# Altium PCB PCB1 (Light).PcbDoc
Units mm, origin at the board's own origin, x right, y up, seen from the top; angles counter-clockwise.
Board outline 40 x 66.29 mm, 2 copper layers (Top Layer, Bottom Layer); 16 components, 6 nets, 35 pads, 0 vias.
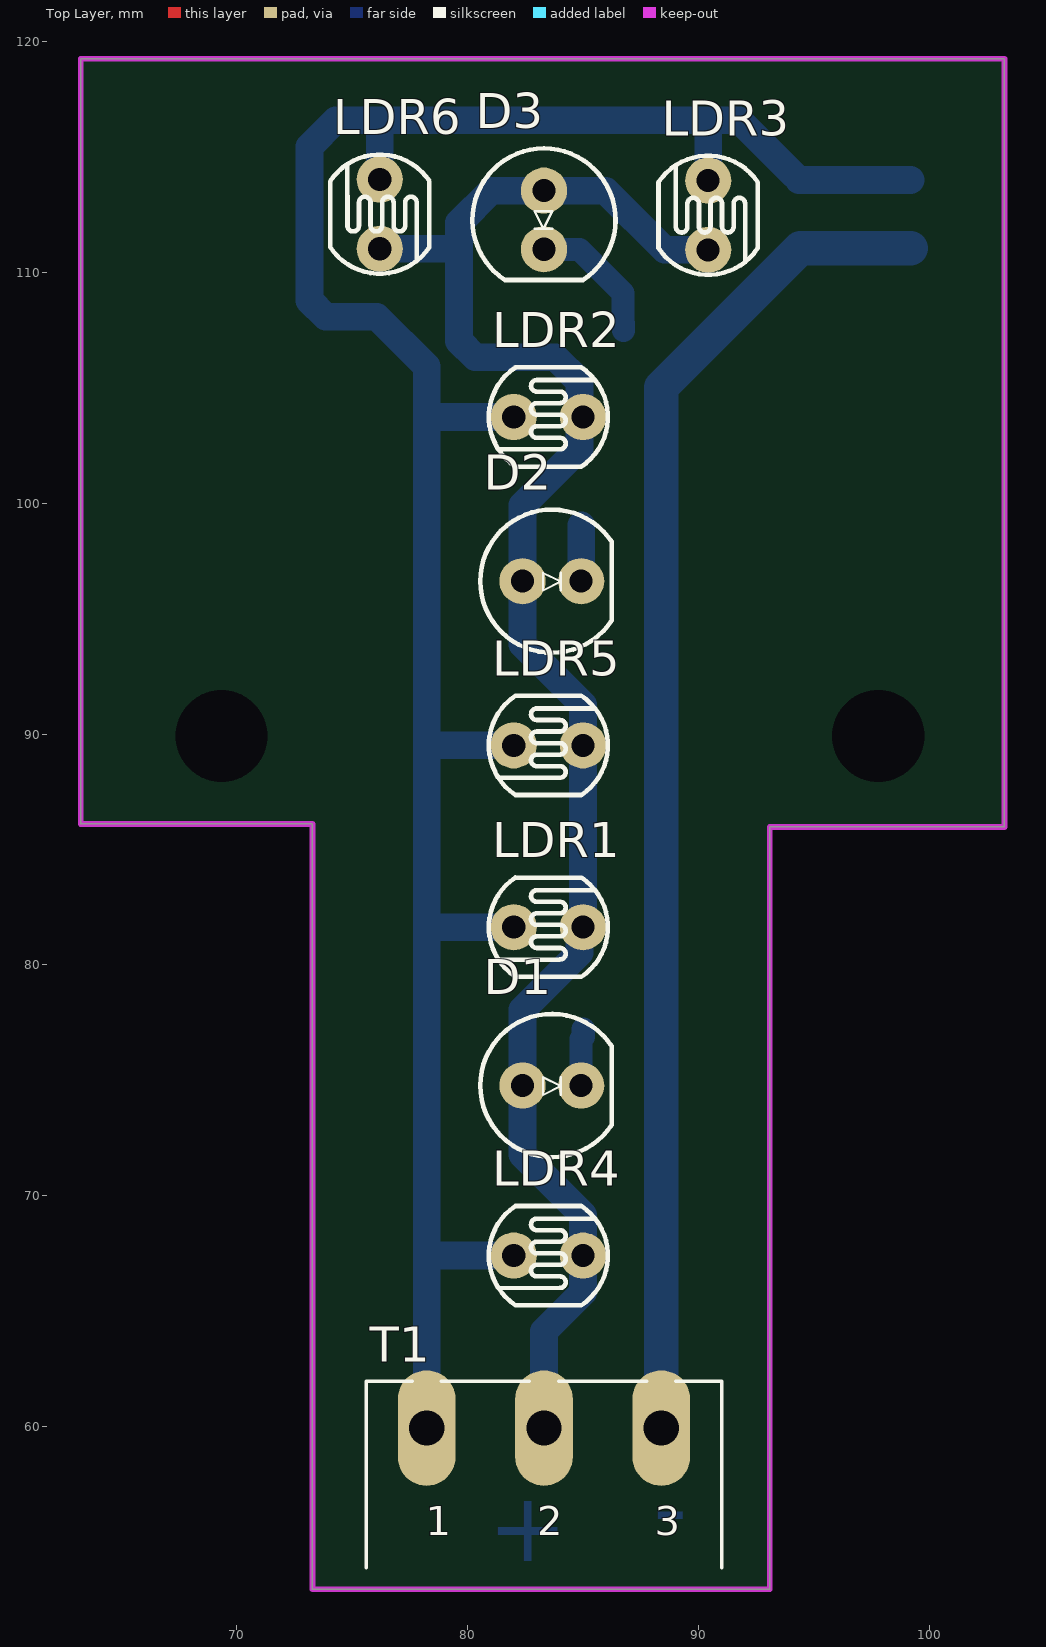
[diagram p0: Top Layer view]
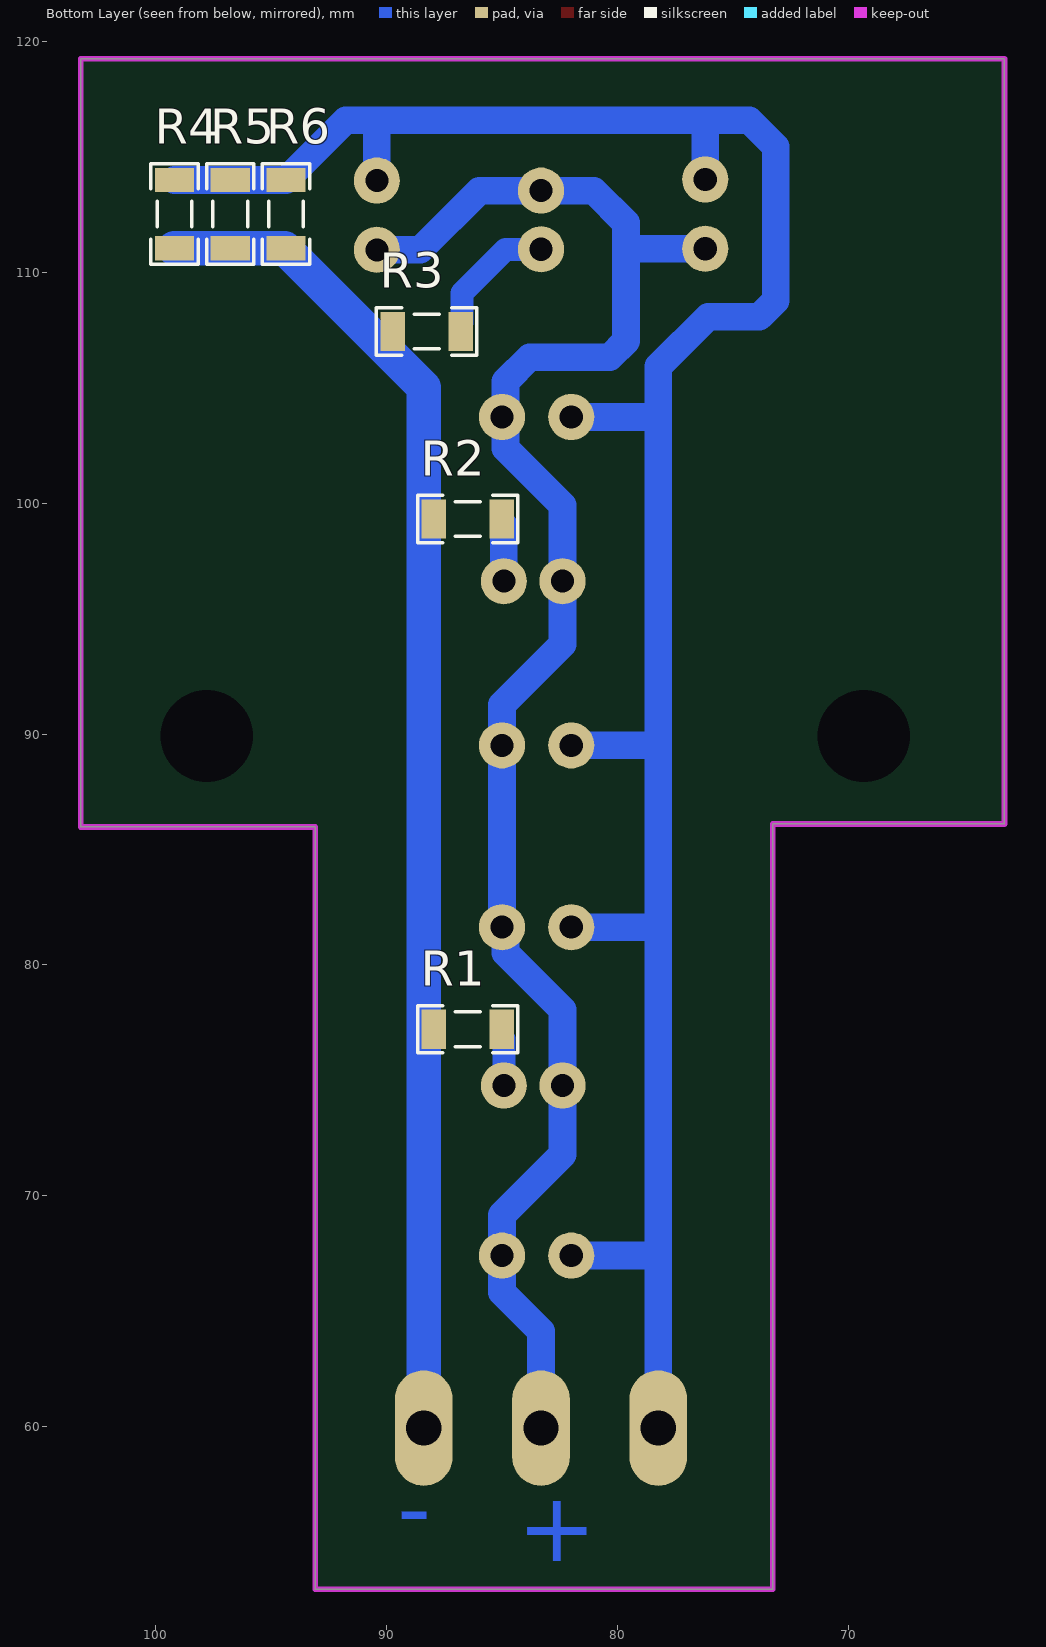
[diagram p1: Bottom Layer view, seen from below]
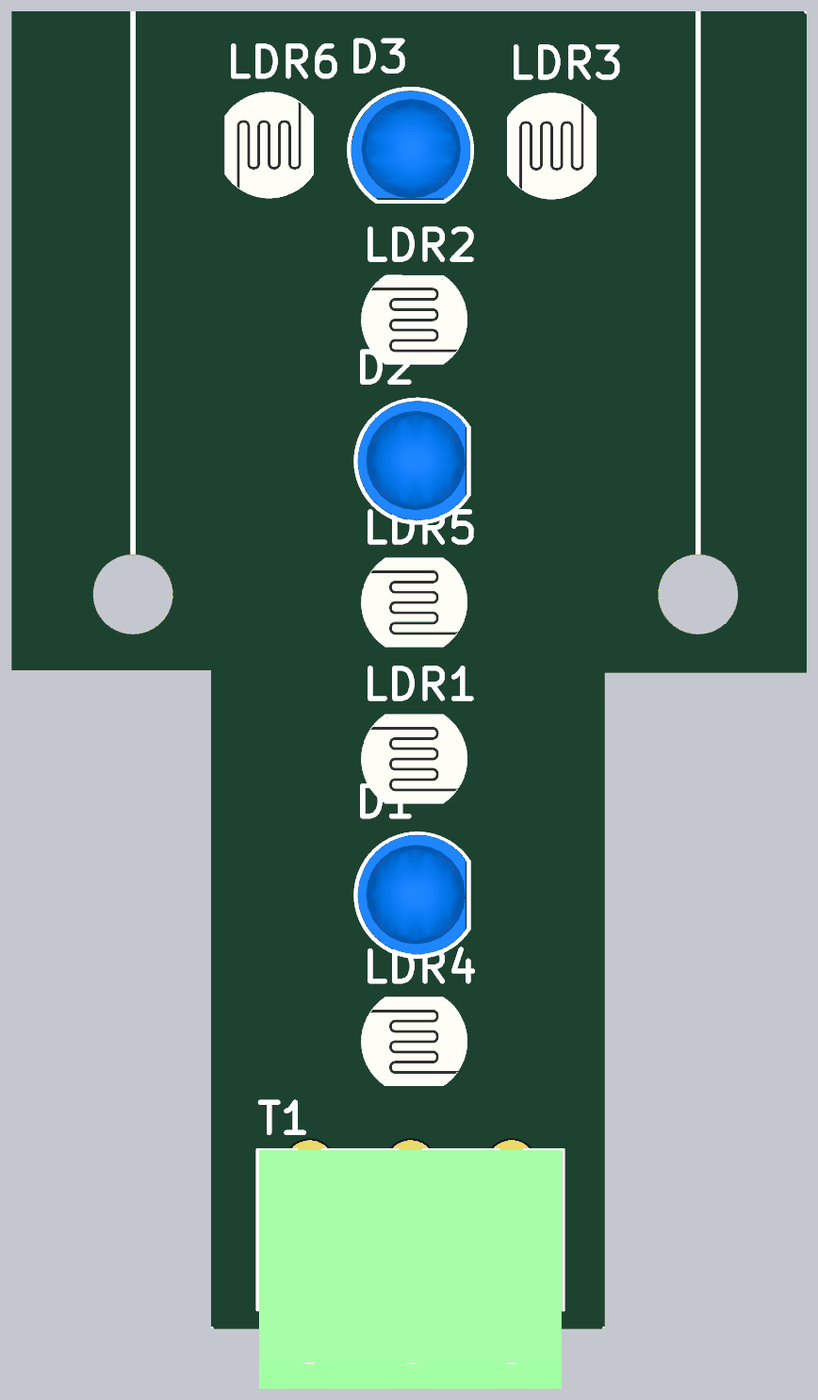
[diagram p2: 3D render of the assembled board from above, using the file's embedded part models]
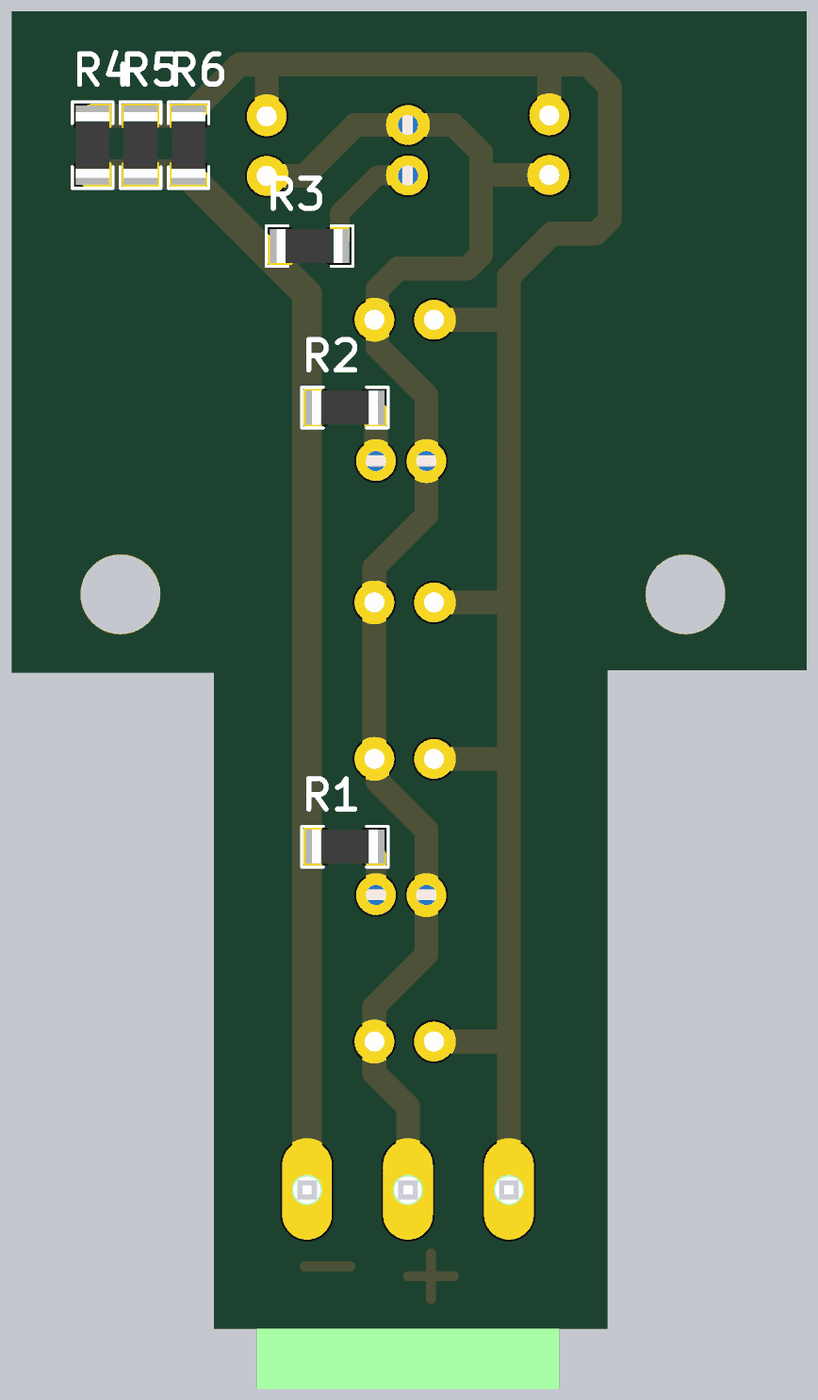
[diagram p3: 3D render of the assembled board from below, using the file's embedded part models]

## Layer stack, top to bottom
Top Solder: solder mask 0.0102, Solder Resist, Dk 3.5
Top Layer: signal copper 0.0356
Dielectric 1: dielectric 0.32, FR-4, Dk 4.8
Bottom Layer: signal copper 0.0356
Bottom Solder: solder mask 0.0102, Solder Resist, Dk 3.5

## Board outline
63.246,86.106 73.279,86.106 73.279,52.959 93.091,52.959 93.091,85.979 103.251,85.979 103.251,119.253 63.246,119.253

## Design rules (kind name [scope] priority, off if disabled: settings)
Clearance [All] p1: gap=0.254 ignorepadtopadclearanceinfootprint=FALSE
PolygonConnect [All] p1: connectstyle=Relief reliefconductorwidth=0.254 reliefentries=4 polygonreliefangle="90 Angle" airgapwidth=0.254
RoutingVias [All] p1: holewidth=0.711 width=1.27 viastyle="Through Hole" minholewidth=0.711 minwidth=1.27 maxholewidth=0.711 maxwidth=1.27
SolderMaskExpansion [All] p1: expansion=0.102 istentingtop=FALSE
SupplyNets "Schematic Supply Nets_1" [InNet('GND')] p1: voltage=0.000
SupplyNets "Schematic Supply Nets" [InNet('+5')] p2: voltage=0.000
Width [All] p1: maxlimit=3 minlimit=0.254 preferedwidth=1
30 further rules are at their usual default settings.

## Components (designator, comment, footprint, x,y, rotation, side; value= is the part's Value field where it differs from the comment)
D1 "LED 5MM" LED5MM_BLUE 83.653,74.779 r0 top
D2 "LED 5MM" LED5MM_BLUE 83.653,96.623 r0 top
D3 "LED 5MM" LED5MM_BLUE 83.312,112.268 r270 top
LDR1 "PhotoCell" PhotoCell 83.502,81.637 r0 top
LDR2 "PhotoCell" PhotoCell 83.502,103.735 r0 top
LDR3 "PhotoCell" PhotoCell 90.424,112.474 r270 top
LDR4 "PhotoCell" PhotoCell 83.502,67.413 r0 top
LDR5 "PhotoCell" PhotoCell 83.502,89.511 r0 top
LDR6 "PhotoCell" PhotoCell 76.2,112.522 r270 top
R1 "1K" RES1206 86.487,77.216 r180 bottom
R2 "1K" RES1206 86.487,99.314 r180 bottom
R3 "1K" RES1206 88.265,107.442 r180 bottom
R4 "1K" RES1206 99.187,112.522 r90 bottom
R5 "1K" RES1206 96.774,112.522 r90 bottom
R6 "1K" RES1206 94.361,112.522 r90 bottom
T1 "PHOENIX" "MSTB 2,5/3-G-5,08" 83.312,59.944 r0 top

## Footprints (in the part's own frame and the unit in brackets; to place one, negate y for a bottom-side part, rotate by r counter-clockwise, add the part's x,y. Pads: shape width x height; smd on the part's side, far side on the other; paste and mask are expansions set on the pad)
LED5MM_BLUE [mm] "LED 5MM THROUGH HOLE BLUE-Designer Abbas Basereh"
  round 2 hole 1: 1(-1.27,0) 2(1.27,0)
  silkscreen extent -3.1,-3.1 2.6,3.1, body extent -2.99,-2.98 2.43,3.04, height 12.31
"MSTB 2,5/3-G-5,08" [mm] "Header, Nominal current: 12 A Rated voltage (III/2): 320 V Number of positions: 3 Pitch: 5.08 mm Color: green Contact surface: Tin Assembly: Soldering  DESIGNER:ABBAS BASEREH"
  oval 2.5x5 hole 1.524: 1(-5.08,0) 2(0,0) 3(5.08,0)
  silkscreen extent -7.7,-6.05 7.7,2.03, body extent -7.62,-10 7.62,2, height 8.63
PhotoCell [mm]
  round 2 hole 1: 1(-1.5,0) 2(1.5,0)
  silkscreen extent -2.58,-2.15 2.58,2.15, body extent -2.61,-2.16 2.61,2.14, height 2.44
RES1206 [mm] "Chip Resistor, 2-Leads, Body 3/20x1/60mm, IPC Medium Density DESIGNER:ABBAS BASEREH"
  rect 1.05x1.7 smd: 1(-1.475,0) 2(1.475,0)
  silkscreen extent -2.17,-1.02 2.17,1.02, body extent -1.65,-0.85 1.65,0.85, height 0.94

## Part data
D1 D2 D3: "Light Emitting Diode", Data=16-12-2016, Designer="Abbas Basereh"
LDR1 LDR2 LDR3 LDR4 LDR5 LDR6: library part LDR, "Photo Cell- Variable Resistor With Light", Company="IPA CO.", Designer="Saeid Jorablo", Last Update Time=2008/07/17
R1 R2 R3 R4 R5 R6: library part "RES SMD PACKAGE", "TOTAL SMD RESISTOR PACK", Data=2017-3-10, Desc.="RES SMD PAKAGES", Designer="Abbas Basereh"
T1: library part CON_Phoenix_MSTB_03, "3 Pitch: 5.08 mm Color: green Contact surface: Tin Assembly", Manufacturer="PHOENIX CONTACT", Max Current="12 A", Voltage="320 V", Category=Connector, ComponentLink1Description="Header, Nominal current: 12 A Rated voltage (III/2): 320 V Number of positions: 3 Pitch: 5.08 mm Color: green Contact surface: Tin Assembly: Soldering  DESIGNER:ABBAS BASEREH", ComponentLink2Description=Reference, Connector type="PCB Terminal Block", Designer="ABBAS BASEREH", Mounting Technology=Through-Hole, Part.No=PHOENIX, Pin Count=3, Positions=3, Revision 1=2017-3-1, Status=Unreleased

## Free pads (board coordinates)
  round 1.524 hole 4: 5(69.342,89.916) 5(97.79,89.916)

## Nets (pads, with @x,y where several pads share a name; then routed paths per layer and width w, separated by ;. In a path a pad name is that pad's centre, name@x,y a point inside that pad or via, vN(x,y) a via of type N, cw(c..) or ccw(c..) an arc to the next point about the centre after c; other vN are vias at no path point)
+5: D1.1 D2.1 D3.1 LDR1.2 LDR2.2 LDR3.2 LDR4.2 LDR5.2 LDR6.2 T1.2 | length 77.5
  Bottom Layer w1.2: LDR6.2 79.351,111.022 79.629,110.744 ; T1.2 83.312,64.135 85.002,65.825 85.002,69.176 82.384,71.794 D1.1 82.384,78.066 84.849,80.531 84.849,81.484 LDR1.2 LDR5.2 85.002,91.274 82.384,93.892 D2.1 82.384,99.91 84.849,102.375 84.849,103.582 LDR2.2 84.849,103.888 84.849,105.27 83.798,106.321 80.332,106.321 79.629,107.024 79.629,110.744 ; LDR3.2 88.543,110.974 85.979,113.538 D3.1 81.026,113.538 79.629,112.141 79.629,110.744
GND: R1.1 R2.1 R3.1 R4.1 R5.1 R6.1 T1.3 | length 58.4
  Bottom Layer w1.5: T1.3 88.392,105.029 94.41,111.047 R5.1 R4.1
NetD1_2: D1.2 R1.2 | length 2.5
  Bottom Layer w1: D1.2 84.924,76.802 85.012,76.891 R1.2
NetD2_2: D2.2 R2.2 | length 2.4
  Bottom Layer w1.2: D2.2 R2.2@84.924,99.05
NetD3_2: D3.2 R3.2 | length 5.8
  Bottom Layer w1: D3.2 83.318,110.992 84.842,110.992 86.741,109.093 86.741,107.816 86.765,107.792 R3.2@86.765,107.482
NetLDR1_1: LDR1.1 LDR2.1 LDR3.1 LDR4.1 LDR5.1 LDR6.1 R4.2 R5.2 R6.2 T1.1 | length 106.6
  Bottom Layer w1.2: LDR6.1 76.2,116.459 76.327,116.586 ; T1.1 78.232,67.31 ; LDR4.1 78.335,67.413 78.232,67.31 ; LDR1.1 78.335,81.637 78.232,81.534 ; LDR5.1 78.383,89.511 78.232,89.662 ; LDR2.1 78.256,103.735 78.232,103.759 ; LDR3.1 90.424,116.586 ; R6.2@94.111,114.247 91.772,116.586 90.424,116.586 ; R6.2 R5.2 R4.2 ; 76.327,116.586 90.424,116.586 ; 76.327,116.586 74.295,116.586 73.152,115.443 73.152,108.78 73.855,108.077 76.073,108.077 78.232,105.918 78.232,103.759 ; 78.232,67.31 78.232,81.534 ; 78.232,81.534 78.232,89.662 ; 78.232,89.662 78.232,103.759

## Keep-outs
Keep-Out Layer:
  the board outline again, w0.254

## Other copper
Bottom Layer:
  text "-" at 89.543,57.261 h3 r180
  text "+" at 84.336,56.769 h3 r180

## Dimensions
73.279,52.959 to 93.091,52.959 on Top Overlay
103.251,119.253 to 93.091,52.959 on Top Overlay
69.342,89.916 to 97.79,89.916 on Top Overlay

## Text inside footprints (layer, text, board x,y; h text height)
T1: Top Overlay "1" at 78.2,55.309 h1.27; Top Overlay "2" at 83.026,55.309 h1.27; Top Overlay "3" at 88.106,55.309 h1.27